# Altium PCB dev_board_layout.PcbDoc (part 1 of 3)
Units mm, origin at the board's own origin, x right, y up, seen from the top; angles counter-clockwise.
Board outline 75.44 x 30.86 mm, 2 copper layers (Top Layer, Bottom Layer); 166 components, 99 nets, 533 pads, 297 vias.
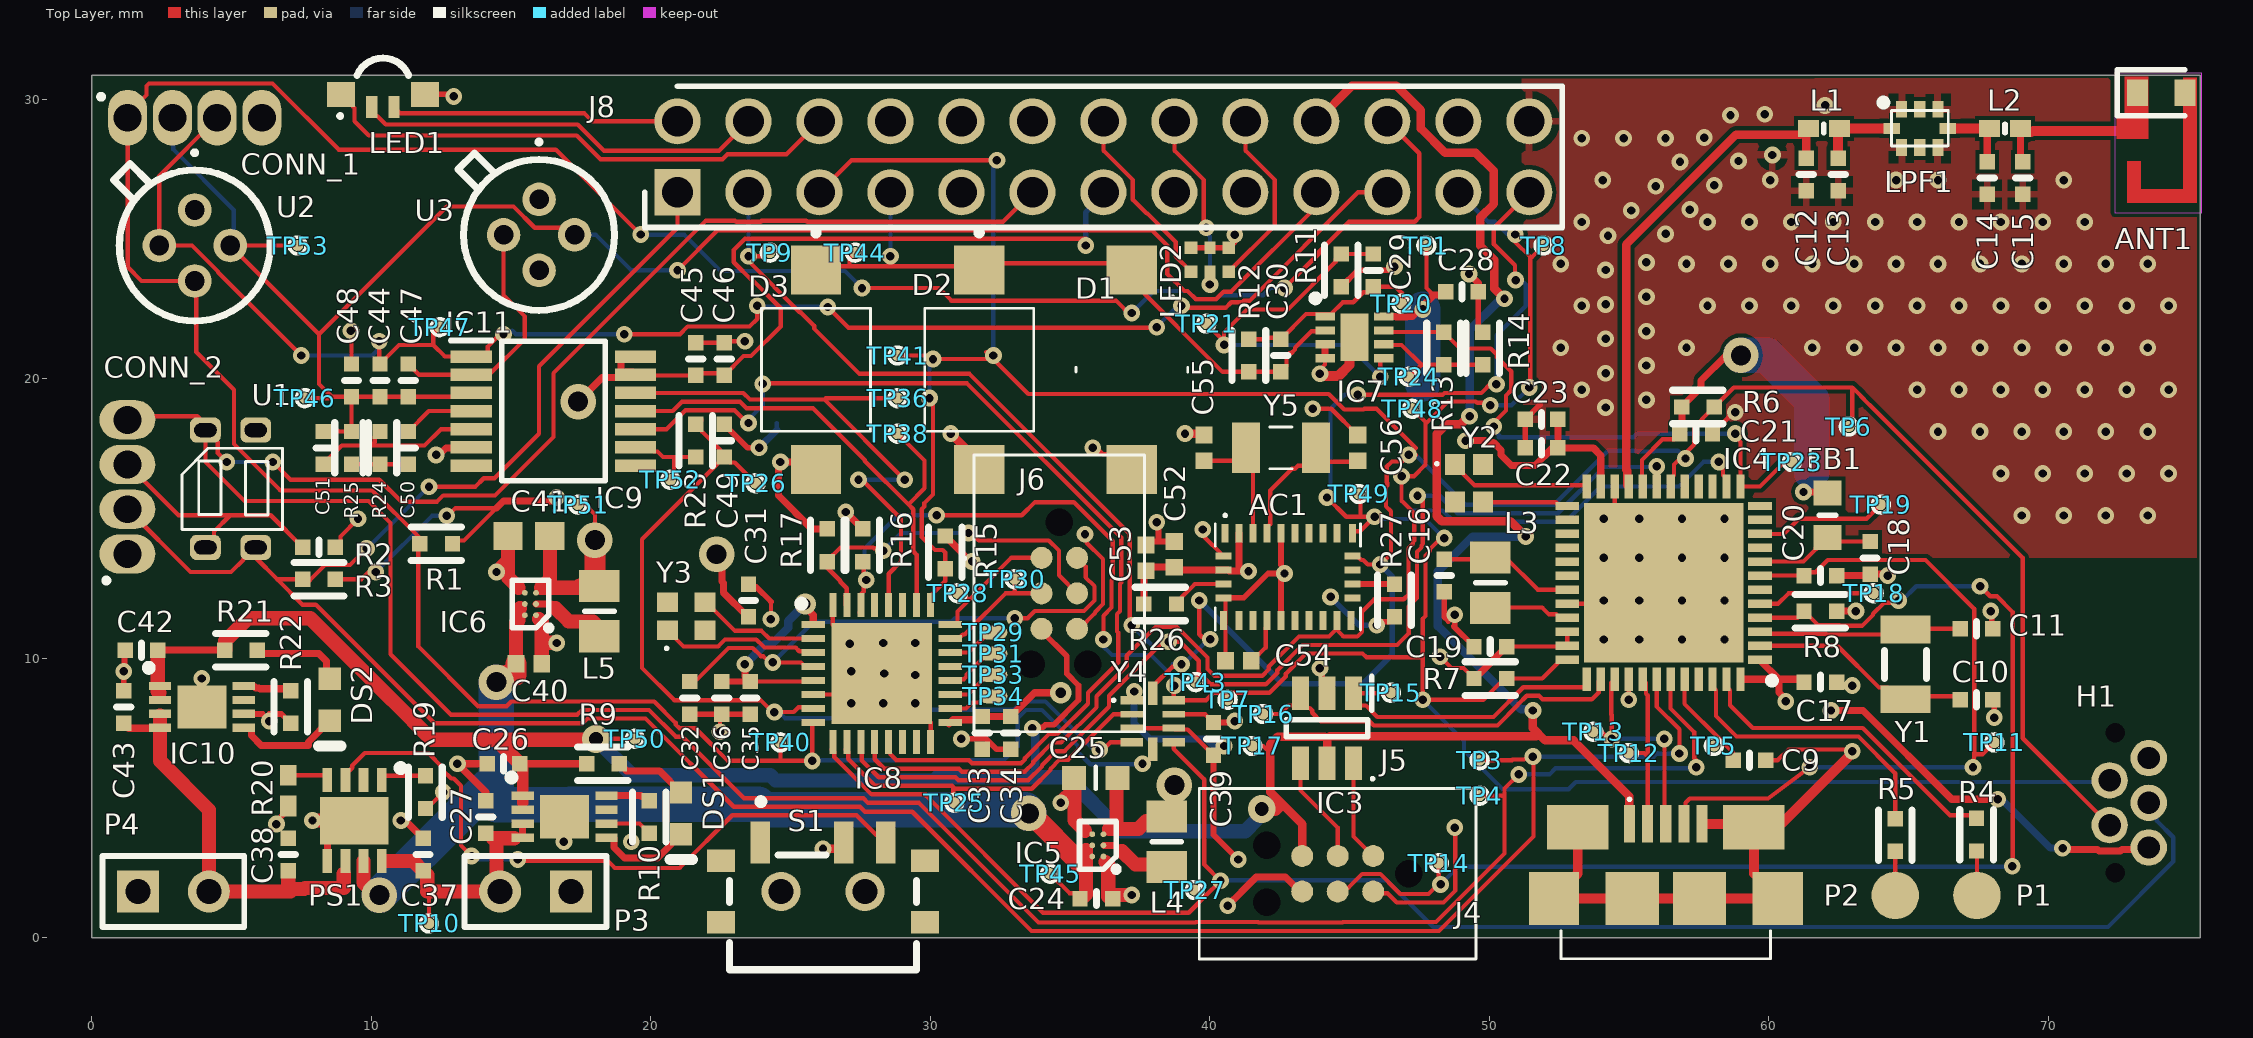
[diagram p0: Top Layer view]
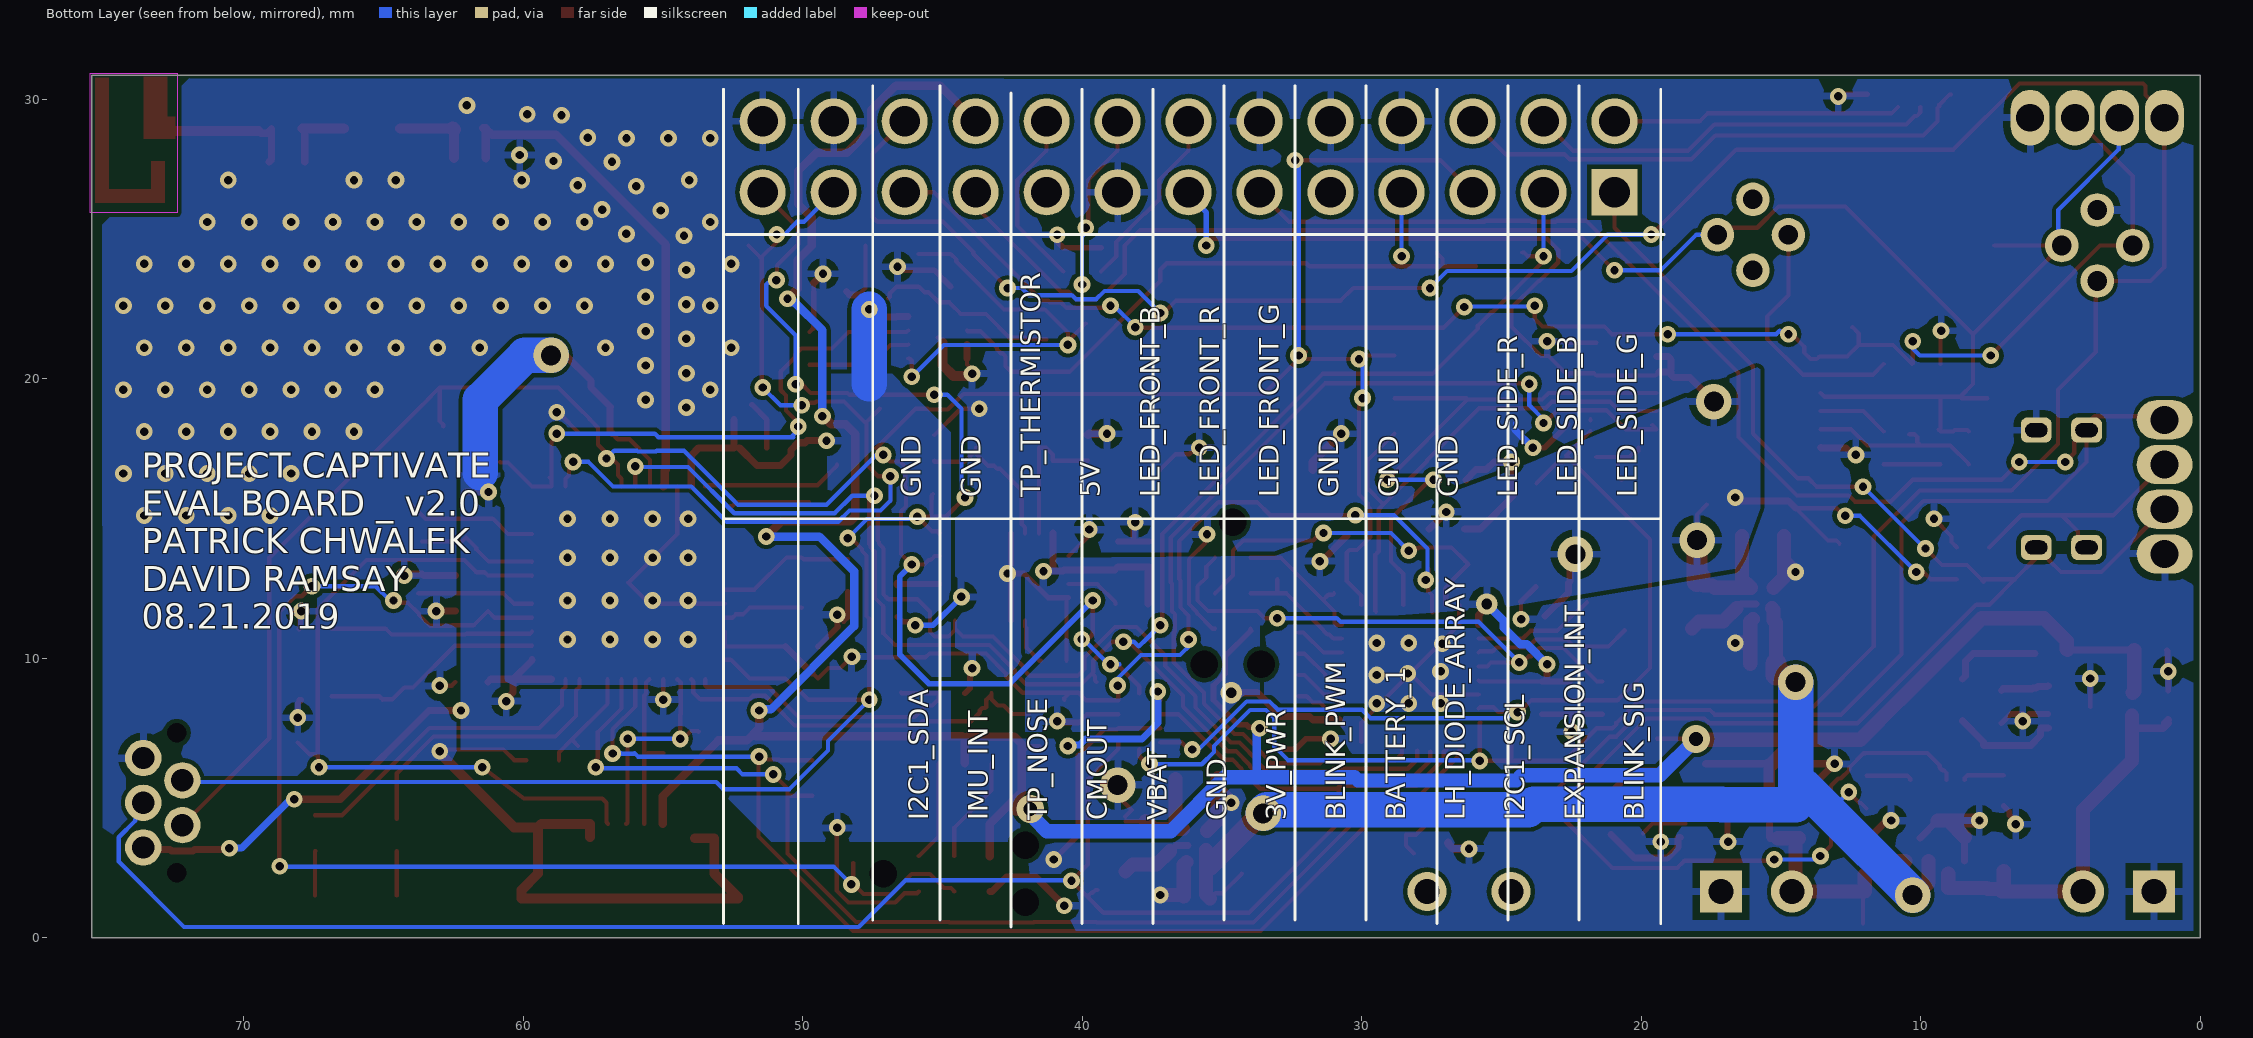
[diagram p1: Bottom Layer view, seen from below]
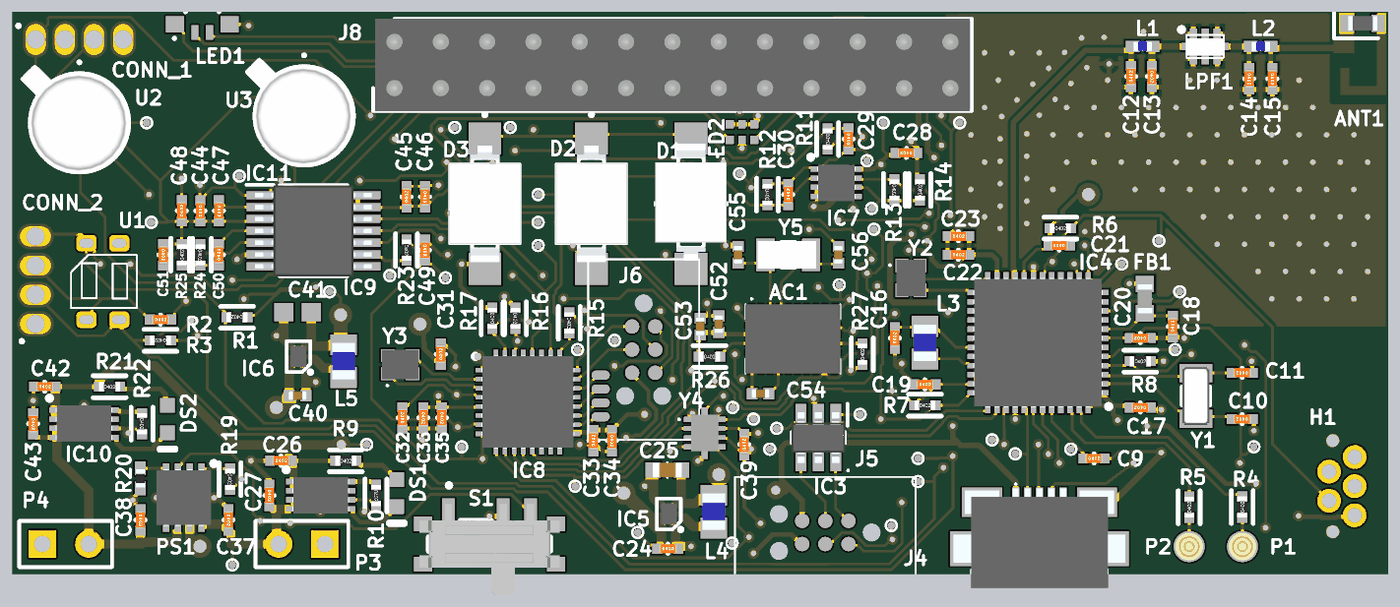
[diagram p3: 3D render of the assembled board from above, using the file's embedded part models]

## Layer stack, top to bottom
Top Solder: solder mask 0.0102, Solder Resist, Dk 3.5
Top Layer: signal copper 0.0356
Dielectric 1: dielectric 0.32, FR-4, Dk 4.8
Bottom Layer: signal copper 0.0356
Bottom Solder: solder mask 0.0102, Solder Resist, Dk 3.5

## Board outline
0,0 75.438,0 75.438,30.861 0,30.861

## Design rules (kind name [scope] priority, off if disabled: settings)
Clearance [All] p1: gap=0.152 ignorepadtopadclearanceinfootprint=FALSE except(0: Arc-Hole Track-Hole SMDPad-Hole THPad-Hole Via-Hole Fill-Hole Poly-Hole Region-Hole Text-Hole)
PolygonConnect [All] p1: connectstyle=Relief reliefconductorwidth=0.254 reliefentries=4 polygonreliefangle="90 Angle" airgapwidth=0.254
RoutingVias RoutingVias_1 [InNet('VBAT_MUX')or InNet('3.3V_MCU')or InNet('3.3V_PWR')] p1: holewidth=0.711 width=1.27 viastyle="Through Hole" minholewidth=0.711 minwidth=1.27 maxholewidth=1 maxwidth=2
RoutingVias [All] p2: holewidth=0.3 width=0.6 viastyle="Through Hole" minholewidth=0.3 minwidth=0.6 maxholewidth=0.711 maxwidth=1.27
SolderMaskExpansion [All] p1: expansion=0.102
Width [InNet('VBAT_MUX')or InNet('3.3V_MCU')or InNet('3.3V_PWR')] p1: maxlimit=1.27 minlimit=0.152 preferedwidth=0.254 minimp=50.000000 maximp=50.000000 favimp=50.000000
Width Width_1 [All] p2: maxlimit=0.508 minlimit=0.152 preferedwidth=0.203 minimp=50.000000 maximp=50.000000 favimp=50.000000
30 further rules are at their usual default settings.

## Classes and differential pairs
component class sch_pwr_brd_sensors: AC1 C44 C45 C46 C47 C48 C49 C50 C51 C52 C53 C54 C55 C56 D3 IC11 R23 R24 R25 R26 R27 TP52 TP53 U3 Y5
component class Sch_pwr_brd_pwr: H1 P4
component class Sch_pwr_brd_pwr_sys: C37 C38 C39 C40 C41 C42 C43 DS2 IC9 IC10 L5 PS1 R19 R20 R21 R22 S1 TP40 TP41 TP43 TP44 TP45 TP46 TP47 TP48 TP49 TP50 TP51 Y4
component class Sch_pwr_brd_MCU: C31 C32 C33 C34 C35 C36 IC8 J6 R15 R16 R17 TP25 TP26 TP27 TP28 TP29 TP30 TP31 TP33 TP34 TP36 TP38 Y3
component class Sch_mcu_brd_sensors: C28 C29 C30 D2 IC7 R11 R12 R13 R14 TP20 TP21 TP23 TP24
component class Sch_mcu_brd_pwr: C24 C25 C26 C27 DS1 IC5 IC6 L4 P3 R9 R10
component class Sch_mcu_brd_mcu: ANT1 C10 C11 C12 C13 C14 C15 C16 C17 C18 C19 C20 C21 C22 C23 FB1 IC4 L1 L2 L3 LPF1 R6 R7 R8 TP18 TP19 Y1 Y2
component class Sch_mcu_brd_external_connectors: C9 IC3 J4 J5 P1 P2 R4 R5 TP1 TP3 TP4 TP5 TP6 TP7 TP8 TP9 TP10 TP11 TP12 TP13 TP14 TP15 TP16 TP17
component class Sch_front: CONN_1 CONN_2 D1 R1 R2 R3 U1 U2
component class Sch_front_led: C? J8 LED1 LED2 LED3 LED4 LED5 LED6

## Components (designator, comment, footprint, x,y, rotation, side; value= is the part's Value field where it differs from the comment)
AC1 "BNO080" BNO080 42.799,13.081 r90 top
ANT1 "2450AT14A0100T" ANTC1608X40N 74.041,30.226 r0 top
C9 "10000pF" SMD-0402C 59.309,6.35 r270 top
C10 "15pF" SMD-0402C 67.437,8.509 r90 top
C11 "15pF" SMD-0402C 67.437,11.049 r90 top
C12 "0.80pF" SMD-0402C 61.341,27.305 r0 top
C13 "0.30pF" SMD-0402C 62.484,27.305 r180 top
C14 "0.80pF" SMD-0402C 67.818,27.178 r180 top
C15 "0.30pF" SMD-0402C 69.088,27.178 r180 top
C16 "4.7µF" SMD-0402C 48.387,12.954 r0 top
C17 "0.10µF" SMD-0402C 61.849,9.144 r90 top
C18 "0.10µF" SMD-0402C 63.627,13.589 r0 top
C19 "0.10µF" SMD-0402C 50.038,10.414 r270 top
C20 "0.10µF" SMD-0402C 61.849,12.954 r90 top
C21 "0.10µF" SMD-0402C 57.404,18.034 r90 top
C22 "0.10µF" SMD-0402C 51.871,17.526 r270 top
C23 "100pF" SMD-0402C 51.871,18.542 r270 top
C24 "2.2µF" SMD-0402C 35.941,1.397 r270 top
C25 "10µF" SMD-0603C 35.922,5.715 r90 top
C26 "4.7µF" SMD-0402C 14.732,6.223 r270 top
C27 "4.7µF" SMD-0402C 14.097,4.318 r180 top
C28 "0.10µF" SMD-0402C 49.022,23.114 r90 top
C29 "10000pF" SMD-0402C 45.847,23.876 r180 top
C30 "5pF" SMD-0402C 42.545,20.828 r0 top
C31 "0.10µF" SMD-0402C 23.495,12.065 r0 top
C32 "0.10µF" SMD-0402C 21.393,8.579 r0 top
C33 "4.7µF" SMD-0402C 31.865,7.328 r0 top
C34 "0.10µF" SMD-0402C 32.881,7.328 r180 top
C35 "10000pF" SMD-0402C 23.552,8.579 r180 top
C36 "1uF" SMD-0402C 22.536,8.579 r180 top
C37 "0.10µF" SMD-0402C 11.852,2.974 r180 top
C38 "0.10µF" SMD-0402C 7.026,2.974 r180 top
C39 "0.10µF" SMD-0402C 40.132,7.112 r0 top
C40 "2.2uF" CAPC1005X55N 15.64,9.798 r180 top
C41 "GRM188R60J106ME47D" CAPC1608X09N 15.64,14.37 r0 top
C42 "4.7µF" SMD-0402C 1.778,10.287 r270 top
C43 "4.7µF" SMD-0402C 1.143,8.255 r180 top
C44 "10000pF" SMD-0402C 10.309,19.939 r180 top
C45 "10000pF" SMD-0402C 21.612,20.701 r0 top
C46 "10µF" SMD-0402C 22.628,20.701 r180 top
C47 "10000pF" SMD-0402C 11.325,19.939 r180 top
C48 "10000pF" SMD-0402C 9.293,19.939 r0 top
C49 "1µF" SMD-0402C 22.628,17.78 r180 top
C50 "10µF" SMD-0402C 11.325,17.526 r0 top
C51 "6800pF" SMD-0402C 8.277,17.526 r180 top
C52 "0.10µF" CAPC1005X55N 38.735,13.716 r90 top
C53 "0.10µF" CAPC1005X55N 37.719,13.589 r90 top
C54 "0.10µF" CAPC1005X55N 41.021,9.906 r180 top
C55 "15pF" CAPC1005X55N 39.795,17.526 r90 top
C56 "15pF" CAPC1005X55N 45.295,17.526 r90 top
CONN_1 "THERMO" 4_pos_1mm_header 3.683,29.337 r0 top
CONN_2 "BLINK" 4_pos_1mm_header 1.27,16.129 r90 top
D1 "VBPW34FASR" VBPW34FAS 37.211,20.32 r270 top
D2 "VBPW34FASR" VBPW34FASR 31.75,20.32 r270 top
D3 "VBPW34FASR" VBPW34FASR 25.908,20.32 r270 top
DS1 "LTST-C190KFKT" LTST-C190KFKT_V 21.082,4.445 r270 top
DS2 "LTST-C190KFKT" LTST-C190KFKT_V 8.509,8.509 r270 top
FB1 "BLM18KG601SZ1D" BEADC1608X95N 62.103,15.113 r90 top
H1 "HTP-CON-M413" HTP-CON-M413 72.898,4.826 r270 top
IC3 "USBLC6-2SC6" SOT95P280X145-6N 44.196,7.493 r270 top
IC4 "STM32WB55CGU6" QFN50P700X700X65-49N-D 56.24,12.696 r180 top
IC5 "FAN53600AUC33X" BGA6C40P2X3_86X116X62 35.995,3.302 r180 top
IC6 "MCP73831T-2ACI_MC" SON50P300X200X100-9N-D 16.915,4.33 r0 top
IC7 "TLV9062IDSGT" SON50P200X200X80-9N 45.178,21.475 r0 top
IC8 "STM32F301K6U6" QFN50P500X500X60-33N-D 28.263,9.45 r0 top
IC9 "FAN53600AUC33X" BGA6C40P2X3_86X116X62 15.694,11.938 r180 top
IC10 "MCP73831T-2ACI_MC" SON50P300X200X100-9N-D 3.937,8.255 r0 top
IC11 "LMP91051MT_NOPB" SOP65P640X120-14N 16.515,18.841 r0 top
J4 "ZX62-B-5PA(33)" ZX62B5PA33 56.318,2.122 r0 top
J5 "TC2030-CTX-NL" TC2030MCPNL10 44.577,2.487 r180 top
J6 "TC2030-CTX-NL" TC2030MCPNL10 34.417,12.319 r270 top
J8 "1-103542-2" HDRV26W89P254X254_2X13_3261X506X1074P 20.955,26.67 r0 top
L1 "LQG15HS2N7S02D" INDC1005X55N 61.976,28.956 r0 top
L2 "LQG15HS2N7S02D" INDC1005X55N 68.453,28.956 r0 top
L3 "LBR2012T100K" INDC2012X145N 50.038,12.7 r90 top
L4 "LQM21PN1R0MC0D" INDC2012X55N 38.462,3.429 r90 top
L5 "LQM21PN1R0MC0D" INDC2012X55N 18.161,11.684 r90 top
LED1 "APFA3010SEKJ3ZGKQBKC" KPFA-3010RGBC-11 10.414,29.972 r180 top
LED2 "SMLP36RGB2W3R" ROHM-1510-(0604) 40.005,24.257 r0 top
LPF1 "LFL212G45TC1A007" LFL212G45TC1A007 65.405,28.956 r0 top
P1 "P70-5000045R" P70-5000045R 67.449,1.512 r0 top
P2 "P70-5000045R" P70-5000045R 64.528,1.512 r0 top
P3 "Header 2" HDR1X2 17.145,1.651 r180 top
P4 "Header 2" HDR1X2 1.651,1.651 r0 top
PS1 "TPS2115ADRBR" SON65P300X300X100-9N-D 9.398,4.191 r270 top
R1 "100k" SMD-0402-RES 12.319,14.097 r90 top
R2 "100" SMD-0402C 8.128,13.97 r270 top
R3 "50K" SMD-0402-RES 8.128,12.827 r90 top
R4 "1k" SMD-0402-RES 67.437,3.683 r0 top
R5 "1k" SMD-0402-RES 64.528,3.671 r0 top
R6 "10k" SMD-0402-RES 57.468,18.986 r270 top
R7 "10k" SMD-0402-RES 50.038,9.271 r270 top
R8 "100k" SMD-0402-RES 61.849,11.684 r270 top
R9 "80.6k" SMD-0402-RES 18.288,6.223 r270 top
R10 "5.6k" SMD-0402-RES 19.939,4.318 r180 top
R11 "47k" SMD-0402-RES 44.704,23.876 r0 top
R12 "100k" SMD-0402-RES 41.402,20.828 r180 top
R13 "47k" SMD-0402-RES 48.366,21.082 r180 top
R14 "3.3k" SMD-0402-RES 49.763,21.082 r0 top
R15 "10k" SMD-0402-RES 30.537,13.786 r180 top
R16 "10k" SMD-0402-RES 27.585,14.04 r180 top
R17 "10k" SMD-0402-RES 26.315,14.04 r0 top
R19 "1M" SMD-0402-RES 11.938,5.207 r180 top
R20 "ERJ-2RKF7500X" RESC1005X40N 7.026,5.26 r90 top
R21 "80.6k" SMD-0402-RES 5.334,10.287 r270 top
R22 "5.6k" SMD-0402-RES 7.112,8.255 r180 top
R23 "1k" SMD-0402-RES 21.612,17.78 r180 top
R24 "160k" SMD-0402-RES 10.309,17.526 r180 top
R25 "160k" SMD-0402-RES 9.293,17.526 r0 top
R26 "10k" SMD-0402-RES 38.227,11.938 r270 top
R27 "0" SMD-0402-RES 46.609,12.065 r0 top
S1 "PCM12SMTR" PCM12SMTR_1 26.162,1.651 r0 top
TP1 "TestPoint" TestPoint_0.4mm 47.752,24.765 r0 top
TP3 "TestPoint" TestPoint_0.4mm 49.657,6.35 r90 top
TP4 "TestPoint" TestPoint_0.4mm 49.657,5.08 r90 top
TP5 "TestPoint" TestPoint_0.4mm 58.039,6.858 r90 top
TP6 "TestPoint" TestPoint_0.4mm 62.865,18.288 r90 top
TP7 "TestPoint" TestPoint_0.4mm 40.64,8.509 r90 top
TP8 "TestPoint" TestPoint_0.4mm 51.943,24.765 r90 top
TP9 "TestPoint" TestPoint_0.4mm 24.257,24.511 r90 top
TP10 "TestPoint" TestPoint_0.4mm 12.065,0.508 r90 top
TP11 "TestPoint" TestPoint_0.4mm 68.072,6.985 r90 top
TP12 "TestPoint" TestPoint_0.4mm 54.991,6.604 r90 top
TP13 "TestPoint" TestPoint_0.4mm 53.721,7.366 r90 top
TP14 "TestPoint" TestPoint_0.4mm 48.193,2.667 r90 top
TP15 "TestPoint" TestPoint_0.4mm 46.482,8.763 r90 top
TP16 "TestPoint" TestPoint_0.4mm 41.91,8.001 r90 top
TP17 "TestPoint" TestPoint_0.4mm 41.529,6.858 r90 top
TP18 "TestPoint" TestPoint_0.4mm 63.754,12.319 r90 top
TP19 "TestPoint" TestPoint_0.4mm 64.008,15.494 r90 top
TP20 "TestPoint" TestPoint_0.4mm 46.858,22.685 r90 top
TP21 "TestPoint" TestPoint_0.4mm 39.878,21.971 r90 top
TP23 "TestPoint" TestPoint_0.4mm 60.833,17.018 r90 top
TP24 "TestPoint" TestPoint_0.4mm 47.117,20.066 r90 top
TP25 "TestPoint" TestPoint_0.4mm 30.861,4.826 r90 top
TP26 "TestPoint" TestPoint_0.4mm 23.749,16.256 r90 top
TP27 "TestPoint" TestPoint_0.4mm 39.462,1.704 r90 top
TP28 "TestPoint" TestPoint_0.4mm 30.988,12.319 r90 top
TP29 "TestPoint" TESTPOINT_1MM_OVAL 32.258,10.922 r90 top
TP30 "TestPoint" TestPoint_0.4mm 33.02,12.827 r90 top
TP31 "TestPoint" TESTPOINT_1MM_OVAL 32.258,10.16 r90 top
TP33 "TestPoint" TESTPOINT_1MM_OVAL 32.258,9.398 r90 top
TP34 "TestPoint" TESTPOINT_1MM_OVAL 32.258,8.636 r90 top
TP36 "TestPoint" TestPoint_0.4mm 28.829,19.304 r90 top
TP38 "TestPoint" TestPoint_0.4mm 28.829,18.034 r90 top
TP40 "TestPoint" TestPoint_0.4mm 24.638,6.985 r90 top
TP41 "TestPoint" TestPoint_0.4mm 28.829,20.828 r90 top
TP43 "TestPoint" TestPoint_0.4mm 39.497,9.144 r90 top
TP44 "TestPoint" TestPoint_0.4mm 27.305,24.511 r90 top
TP45 "TestPoint" TestPoint_0.4mm 34.29,2.286 r90 top
TP46 "TestPoint" TestPoint_0.4mm 7.62,19.304 r90 top
TP47 "TestPoint" TestPoint_0.4mm 12.446,21.844 r90 top
TP48 "TestPoint" TestPoint_0.4mm 47.244,18.923 r90 top
TP49 "TestPoint" TestPoint_0.4mm 45.339,15.875 r90 top
TP50 "TestPoint" TestPoint_0.4mm 19.431,7.112 r90 top
TP51 "TestPoint" TestPoint_0.4mm 17.399,15.494 r90 top
TP52 "TestPoint" TestPoint_0.4mm 20.701,16.383 r90 top
TP53 "TestPoint" TestPoint_0.4mm 7.366,24.765 r90 top
U1 "QRE1113" QRE1113_DIP 5.864,18.161 r180 top
U2 "ZTP-135SR" ZTP-135SR 3.683,24.765 r0 top
U3 "ZTP-135SR" ZTP-135SR 16.002,25.146 r0 top
Y1 "NX3215SA-32.768K-STD-MUA-8" NX3215SA 64.897,9.779 r90 top
Y2 "XRCGB32M000F1H01R0" XRCGB32M000F1H01R0 49.276,16.256 r270 top
Y3 "XRCGB32M000F1H01R0" XRCGB32M000F1H01R0 21.266,11.5 r0 top
Y4 "ADS1015IRUGT" ADS7142IRUGT 37.961,7.743 r270 top
Y5 "FC-135_32.7680KA-A5" FC135327680KAAG0 42.545,17.526 r0 top

## Footprints (in the part's own frame and the unit in brackets; to place one, negate y for a bottom-side part, rotate by r counter-clockwise, add the part's x,y. Pads: shape width x height; smd on the part's side, far side on the other; paste and mask are expansions set on the pad)
4_pos_1mm_header [mm]
  oval 1.4x2 hole 1 mask-0.15: 1(-2.4,0) 2(-0.8,0) 3(0.8,0) 4(2.4,0)
  silkscreen extent -3.4,0.7 -3.3,0.8
ADS7142IRUGT [mm]
  rect 0.3x0.8 smd: 1(-0.75,-0.75) 4(0.75,-0.75) 6(0.75,0.75) 9(-0.75,0.75)
  rect 0.25x0.8 smd: 2(-0.25,-0.75) 3(0.25,-0.75) 7(0.25,0.75) 8(-0.25,0.75)
  rect 0.85x0.35 smd: 5(1,0) 10(-1,0)
  silkscreen extent -0.8,-1.45 -0.7,-1.35, body extent -1,-0.75 1,0.75, height 0.4
ANTC1608X40N [mm]
  rect 0.75x0.95 smd: 1(-0.85,0) 2(0.85,0)
  silkscreen extent -1.58,-0.82 0.85,0.82, body extent -0.8,-0.4 0.8,0.4, height 0.4
BEADC1608X95N [mm]
  rect 0.9x1 smd: 1(-0.8,0) 2(0.8,0)
  silkscreen extent 0,-0.3 0,0.3, body extent -0.8,-0.4 0.8,0.4, height 0.95
BGA6C40P2X3_86X116X62 [mm]
  round 0.208 smd: A1(-0.2,0.4) A2(0.2,0.4) B1(-0.2,0) B2(0.2,0) C1(-0.2,-0.4) C2(0.2,-0.4)
  silkscreen extent -0.75,-0.85 0.65,0.95, body extent -0.43,-0.58 0.43,0.58, height 0.63
BNO080 [mm]
  rect 0.675x0.25 smd: 1(1.387,2.25) 6(-1.738,2.313) 7(-1.738,1.75) 8(-1.738,1.25) 9(-1.738,0.75) 10(-1.738,0.25) 11(-1.738,-0.25) 12(-1.738,-0.75) 13(-1.738,-1.25) 14(-1.738,-1.75) 15(-1.738,-2.263) 20(1.387,-2.313) 21(1.387,-1.75) 22(1.387,-1.25) 23(1.387,-0.75) 24(1.387,-0.25) 25(1.387,0.25) 26(1.387,0.75) 27(1.387,1.25) 28(1.387,1.75)
  rect 0.25x0.575 smd: 2(0.575,2.313) 3(0.075,2.313) 4(-0.425,2.313) 5(-0.925,2.313) 16(-0.925,-2.313) 17(-0.425,-2.313) 18(0.075,-2.313) 19(0.575,-2.313)
  silkscreen extent -2.07,-2.6 2.07,2.6, body extent -2.07,-2.6 1.73,2.6, height 1.28
CAPC1005X55N [mm]
  rect 0.6x0.62 smd: 1(-0.46,0) 2(0.46,0)
  body extent -0.5,-0.25 0.5,0.25, height 0.55
CAPC1608X09N [mm] "Chip Capacitor, 2-Leads, Body 1.60x0.81mm, IPC Medium Density"
  rect 1.05x1 smd: 1(-0.75,0) 2(0.75,0)
  body extent -0.88,-0.48 0.87,0.48, height 0.94
FC135327680KAAG0 [mm]
  rect 1x1.8 smd: 1(-1.25,0) 2(1.25,0)
  silkscreen extent -0.4,-0.75 0.4,0.75, body extent -1.68,-0.76 1.52,0.74, height 0.9
HDR1X2 [mm] "Connector; Header; 2 Position"
  rect 1.5x1.5 hole 0.9: 1(0,0)
  round 1.5 hole 0.9: 2(2.54,0)
  silkscreen extent -1.27,-1.27 3.81,1.27
HDRV26W89P254X254_2X13_3261X506X1074P [mm]
  rect 1.65x1.65 hole 1.1: 1(0,0)
  round 1.65 hole 1.1: 2(0,2.537) 3(2.54,0) 4(2.54,2.537) 5(5.08,0) 6(5.08,2.537) 7(7.62,0) 8(7.62,2.537) 9(10.16,0) 10(10.16,2.537) 11(12.7,0) 12(12.7,2.537) 13(15.24,0) 14(15.24,2.537) 15(17.78,0) 16(17.78,2.537) 17(20.32,0) 18(20.32,2.537) 19(22.86,0) 20(22.86,2.537) 21(25.4,0) 22(25.4,2.537) 23(27.94,0) 24(27.94,2.537) 25(30.48,0) 26(30.48,2.537)
  silkscreen extent -1.17,-1.26 31.65,3.8, body extent -1.07,-1.26 31.55,3.8, height 10.74
HTP-CON-M413 [mm]
  round 1.3 hole 0.8: 1(1.6,0.7) 2(0.8,-0.7) 3(0,0.7) 4(-0.8,-0.7) 5(-1.6,0.7)
  round 0 hole 0.7: ""(-2.5,-0.5) ""(2.5,-0.5)
INDC1005X55N [mm]
  rect 0.75x0.6 smd: 1(-0.55,0) 2(0.55,0)
  silkscreen extent 0,-0.15 0,0.15, body extent -0.5,-0.25 0.5,0.25, height 0.55
INDC2012X55N [mm]
  rect 1.15x1.45 smd: 1(-0.9,0) 2(0.9,0)
  silkscreen extent 0,-0.53 0,0.53, body extent -1,-0.63 1,0.63, height 0.55
INDC2012X145N [mm]
  rect 1.15x1.45 smd: 1(-0.9,0) 2(0.9,0)
  silkscreen extent 0,-0.53 0,0.53, body extent -1,-0.63 1,0.63, height 1.45
KPFA-3010RGBC-11 [mm]
  rect 1x0.9 smd: 1(1.5,-0.2) 2(-1.5,-0.2)
  rect 0.4x0.8 smd: 3(-0.4,0.25) 4(0.4,0.25)
  silkscreen extent -0.92,-1.5 1.54,0.59
LFL212G45TC1A007 [mm]
  rect 0.4x0.6 smd: 1(-0.65,0.685) 2(0,0.685) 3(0.65,0.685) 5(0.65,-0.685) 6(0,-0.685) 7(-0.65,-0.685)
  rect 0.6x0.4 smd: 4(1,0) 8(-1,0)
  silkscreen extent -1.42,-0.64 1.02,1.05, body extent -1,-0.5 1,0.45, height 0.87
LTST-C190KFKT_V [mm] "SMD, 2-Leads, Body 1.6x0.8mm"
  rect 0.8x0.8 smd: 1(-0.75,0) 2(0.75,0)
  silkscreen extent 1.65,-0.4 1.65,0.4, body extent -0.8,-0.4 0.8,0.4, height 0.9
NX3215SA [mm]
  rect 1x1.8 smd: 1(-1.25,0) 2(1.25,0)
  silkscreen extent -0.5,-0.75 0.5,0.75, body extent -1.6,-0.75 1.6,0.75, height 0.8
P70-5000045R [mm]
  round 1.7 smd: 1(0,0)
  body extent -0.75,-0.75 0.75,0.75, height 2.4
PCM12SMTR_1 [mm]
  rect 0.7x1.5 smd: 1(-2.25,1.75) 2(0.75,1.75) 3(2.25,1.75)
  rect 1x0.8 smd: 4(-3.65,1.1) 5(-3.65,-1.1) 6(3.65,1.1) 7(3.65,-1.1)
  round 1.4 hole 0.9: 8(-1.5,0) 9(1.5,0)
  silkscreen extent -3.35,-2.8 3.35,3.32, body extent -3.85,-2.8 3.85,2.2, height 1.4
QFN50P500X500X60-33N-D [mm]
  rect 0.85x0.25 smd: 1(-2.45,1.75) 2(-2.45,1.25) 3(-2.45,0.75) 4(-2.45,0.25) 5(-2.45,-0.25) 6(-2.45,-0.75) 7(-2.45,-1.25) 8(-2.45,-1.75) 17(2.45,-1.75) 18(2.45,-1.25) 19(2.45,-0.75) 20(2.45,-0.25) 21(2.45,0.25) 22(2.45,0.75) 23(2.45,1.25) 24(2.45,1.75)
  rect 0.25x0.85 smd: 9(-1.75,-2.45) 10(-1.25,-2.45) 11(-0.75,-2.45) 12(-0.25,-2.45) 13(0.25,-2.45) 14(0.75,-2.45) 15(1.25,-2.45) 16(1.75,-2.45) 25(1.75,2.45) 26(1.25,2.45) 27(0.75,2.45) 28(0.25,2.45) 29(-0.25,2.45) 30(-0.75,2.45) 31(-1.25,2.45) 32(-1.75,2.45)
  rect 3.6x3.6 smd: 33(0,0)
  silkscreen extent -3,2.38 -2.75,2.62, body extent -2.55,-2.55 2.55,2.55, height 0.6
QFN50P700X700X65-49N-D [mm]
  rect 0.85x0.3 smd: 1(-3.45,2.75) 2(-3.45,2.25) 3(-3.45,1.75) 4(-3.45,1.25) 5(-3.45,0.75) 6(-3.45,0.25) 7(-3.45,-0.25) 8(-3.45,-0.75) 9(-3.45,-1.25) 10(-3.45,-1.75) 11(-3.45,-2.25) 12(-3.45,-2.75) 25(3.45,-2.75) 26(3.45,-2.25) 27(3.45,-1.75) 28(3.45,-1.25) 29(3.45,-0.75) 30(3.45,-0.25) 31(3.45,0.25) 32(3.45,0.75) 33(3.45,1.25) 34(3.45,1.75) 35(3.45,2.25) 36(3.45,2.75)
  rect 0.3x0.85 smd: 13(-2.75,-3.45) 14(-2.25,-3.45) 15(-1.75,-3.45) 16(-1.25,-3.45) 17(-0.75,-3.45) 18(-0.25,-3.45) 19(0.25,-3.45) 20(0.75,-3.45) 21(1.25,-3.45) 22(1.75,-3.45) 23(2.25,-3.45) 24(2.75,-3.45) 37(2.75,3.45) 38(2.25,3.45) 39(1.75,3.45) 40(1.25,3.45) 41(0.75,3.45) 42(0.25,3.45) 43(-0.25,3.45) 44(-0.75,3.45) 45(-1.25,3.45) 46(-1.75,3.45) 47(-2.25,3.45) 48(-2.75,3.45)
  rect 5.7x5.7 smd: 49(0,0)
  silkscreen extent -4,3.38 -3.75,3.62, body extent -3.55,-3.55 3.55,3.55, height 0.65
QRE1113_DIP [mm] "QRE1113 IR PHOTODIODE/TRANSISTOR PAIR"
  rrect50% 1.1x0.9 hole 0.5 slot 0.8 at 0 deg: 1(1.8,0) 2(1.8,4.2) 3(0,4.2) 4(0,0)
  silkscreen extent -0.96,0.65 2.64,3.55
RESC1005X40N [mm]
  rect 0.75x0.6 smd: 1(-0.55,0) 2(0.55,0)
  body extent -0.5,-0.25 0.5,0.25, height 0.4
ROHM-1510-(0604) [mm]
  rect 0.45x0.45 smd: 1(-0.675,-0.425) 3(0.675,-0.425) 4(0.675,0.425) 6(-0.675,0.425)
  rect 0.4x0.45 smd: 2(0,-0.425) 5(0,0.425)
SMD-0402-RES [mm]
  rect 0.55x0.55 smd: 1(0,0.584) 2(0,-0.584)
  silkscreen extent -0.6,-0.9 0.6,0.9, body extent -0.28,-0.57 0.27,0.58, height 0.41
SMD-0402C [mm]
  rect 0.55x0.55 smd: 1(0,0.584) 2(0,-0.584)
  silkscreen extent -0.25,0 0.25,0, body extent -0.25,-0.51 0.25,0.51, height 0.51
SMD-0603C [mm]
  rect 0.85x0.85 smd: 1(0,0.775) 2(0,-0.775)
  silkscreen extent -0.4,0 0.4,0, body extent -0.4,-0.8 0.4,0.8, height 0.9
SON50P200X200X80-9N [mm]
  rect 0.7x0.3 smd: 1(-1.05,0.75) 2(-1.05,0.25) 3(-1.05,-0.25) 4(-1.05,-0.75) 5(1.05,-0.75) 6(1.05,-0.25) 7(1.05,0.25) 8(1.05,0.75)
  rect 1x1.7 smd: 9(0,0)
  silkscreen extent -1.52,1.28 -1.27,1.52, body extent -1.05,-1 1.05,1, height 0.8
SON50P300X200X100-9N-D [mm]
  rect 0.8x0.3 smd: 1(-1.5,0.75) 2(-1.5,0.25) 3(-1.5,-0.25) 4(-1.5,-0.75) 5(1.5,-0.75) 6(1.5,-0.25) 7(1.5,0.25) 8(1.5,0.75)
  rect 1.75x1.55 smd: 9(0,0)
  silkscreen extent -2.02,1.28 -1.77,1.52, body extent -1.55,-1 1.55,1, height 1
SON65P300X300X100-9N-D [mm]
  rect 0.85x0.35 smd: 1(-1.45,0.975) 2(-1.45,0.325) 3(-1.45,-0.325) 4(-1.45,-0.975) 5(1.45,-0.975) 6(1.45,-0.325) 7(1.45,0.325) 8(1.45,0.975)
  rect 1.7x2.45 smd: 9(0,0)
  silkscreen extent -2,1.53 -1.75,1.78, body extent -1.55,-1.5 1.55,1.5, height 1
SOP65P640X120-14N [mm]
  rect 1.475x0.45 smd: 1(-2.938,1.95) 2(-2.938,1.3) 3(-2.938,0.65) 4(-2.938,0) 5(-2.938,-0.65) 6(-2.938,-1.3) 7(-2.938,-1.95) 8(2.938,-1.95) 9(2.938,-1.3) 10(2.938,-0.65) 11(2.938,0) 12(2.938,0.65) 13(2.938,1.3) 14(2.938,1.95)
  silkscreen extent -3.67,-2.5 1.85,2.52, body extent -3.2,-2.5 3.2,2.5, height 1.2
SOT95P280X145-6N [mm]
  rect 1.2x0.6 smd: 1(-1.25,0.95) 2(-1.25,0) 3(-1.25,-0.95) 4(1.25,-0.95) 5(1.25,0) 6(1.25,0.95)
  silkscreen extent -1.85,-1.46 0.3,1.6, body extent -1.4,-1.46 1.4,1.46, height 1.45
TC2030MCPNL10 [mm]
  round 0.787 smd: 1(-1.27,-0.434) 2(-1.27,0.836) 3(0,-0.434) 4(0,0.836) 5(1.27,-0.434) 6(1.27,0.836)
  round 0.495 hole 0.991 unplated: 7(-2.54,0.201) 8(2.54,1.217) 9(2.54,-0.815)
  silkscreen extent -4.95,-3.25 4.95,3.25
TestPoint_0.4mm [mm]
  round 0.4 smd: 1(0,0)
  silkscreen extent -0.3,-0.3 0.3,0.3
TESTPOINT_1MM_OVAL [mm]
  oval 0.5x1 smd: 1(0,0)
VBPW34FAS [mm] "IR Photodiode SMD (Vive)"
  rect 1.75x1.8 smd: 1(-3.575,0) 2(3.575,0)
  silkscreen extent -2.65,-2 0.08,2, body extent -3.29,-1.95 3.11,1.95, height 1.48
VBPW34FASR [mm]
  rect 1.75x1.8 smd: 1(-3.575,0) 2(3.575,0)
  silkscreen extent -5,-1.95 2.2,1.95, body extent -3.2,-1.95 3.2,1.95, height 1.51
XRCGB32M000F1H01R0 [mm]
  rect 0.75x0.7 smd: 1(-0.675,-0.5) 2(0.675,-0.5) 3(0.675,0.5) 4(-0.675,0.5)
  silkscreen extent -0.75,-1.2 -0.65,-1.1, body extent -1,-0.8 1,0.8, height 0.8
ZTP-135SR [mm]
  round 1.2 hole 0.7: 1(0,1.27) 2(1.27,0) 3(0,-1.27) 4(-1.27,0)
  silkscreen extent -2.9,-2.7 2.7,3.35, body extent -3.24,-2.79 2.74,3.19, height 2.67
ZX62B5PA33 [mm]
  rect 0.4x1.35 smd: 1(-1.3,1.95) 2(-0.65,1.95) 3(0,1.95) 4(0.65,1.95) 5(1.3,1.95)
  rect 2.2x1.6 smd: 6(-3.15,1.825) 7(3.15,1.825)
  rect 1.8x1.9 smd: 8(-4,-0.725) 11(4,-0.725)
  rect 1.9x1.9 smd: 9(-1.2,-0.725) 10(1.2,-0.725)
  silkscreen extent -3.75,-2.88 3.75,2.87, body extent -4.72,-2.88 4.72,2.59, height 2.9

## Part data
AC1: "Accelerometer", Manufacturer_Name="Hillcrest Laboratories", Datasheet Link=http://www.hillcrestlabs.com/download/5a05f340566d07c196001ec1, Height=1.18mm, Manufacturer_Part_Number=BNO080
ANT1: "Antenna", Manufacturer_Name="JOHANSON TECHNOLOGY", Mouser Part Number=609-2450AT14A0100T, Datasheet Link=https://www.johansontechnology.com/datasheets/2450AT14A0100/2450AT14A0100.pdf, Height=0.4mm, Manufacturer_Part_Number=2450AT14A0100T, Mouser Price/Stock=https://www.mouser.com/Search/Refine.aspx?Keyword=609-2450AT14A0100T
C9 C29 C35 C44 C45 C47 C48: library part GCM155R71H103KA55D, "CAP CER 10000PF 50V X7R 0402", Digi-Key Part Number=490-4762-1-ND, Manufacturer="Murata Electronics North America", Operating Temperature="-55°C ~ 125°C", Package / Case="0402 (1005 Metric)", Ratings=AEC-Q200, Temperature Coefficient=X7R, Tolerance=±10%, Voltage=50V, @ qty=0, Applications=Automotive, Datasheets=http://www.murata.com/~/media/webrenewal/support/library/catalog/products/capacitor/mlcc/c03e.ashx, Factory Stock=0, Features=-, Height - Seated (Max)=-, Image=//media.digikey.com/Renders/Murata%20Renders/ZRB-SERIES-0402.jpg, Lead Spacing=-, Lead Style=-, Minimum Quantity=1, Mounting Type="Surface Mount, MLCC", Packaging="Cut Tape (CT)", Part Number=GCM155R71H103KA55D, Part Status=Active, Quantity Available=650067, Series=GCM, Size / Dimension="0.039\" L x 0.020\" W (1.00mm x 0.50mm)", Thickness (Max)="0.022\" (0.55mm)", Unit Price (USD)=0.1
C10 C11 C55 C56: library part GCM1555C1H150JA16D, "CAP CER 15PF 50V NP0 0402", Digi-Key Part Number=490-11147-1-ND, Manufacturer="Murata Electronics North America", Operating Temperature="-55°C ~ 125°C", Package / Case="0402 (1005 Metric)", Ratings=AEC-Q200, Temperature Coefficient="C0G, NP0", Tolerance=±5%, Voltage=50V, @ qty=0, Applications=Automotive, Datasheets=http://www.murata.com/~/media/webrenewal/support/library/catalog/products/capacitor/mlcc/c03e.ashx, Factory Stock=0, Features=-, Height - Seated (Max)=-, Image=//media.digikey.com/Renders/Murata%20Renders/ZRB-SERIES-0402.jpg, Lead Spacing=-, Lead Style=-, Minimum Quantity=1, Mounting Type="Surface Mount, MLCC", Packaging="Cut Tape (CT)", Part Number=GCM1555C1H150JA16D, Part Status=Active, Quantity Available=6185, Series=GCM, Size / Dimension="0.039\" L x 0.020\" W (1.00mm x 0.50mm)", Thickness (Max)="0.022\" (0.55mm)", Unit Price (USD)=0.1
C12 C14: library part GRM1555C1HR80BA01D, "CAP CER 0.8PF 50V NP0 0402", Digi-Key Part Number=490-6269-1-ND, Manufacturer="Murata Electronics North America", Operating Temperature="-55°C ~ 125°C", Package / Case="0402 (1005 Metric)", Ratings=-, Temperature Coefficient="C0G, NP0", Tolerance=±0.1pF, Voltage=50V, @ qty=0, Applications="General Purpose", Datasheets=http://www.murata.com/~/media/webrenewal/support/library/catalog/products/capacitor/mlcc/c02e.pdf, Factory Stock=0, Features=-, Height - Seated (Max)=-, Image=//media.digikey.com/Renders/Murata%20Renders/ZRB-SERIES-0402.jpg, Lead Spacing=-, Lead Style=-, Minimum Quantity=1, Mounting Type="Surface Mount, MLCC", Packaging="Cut Tape (CT)", Part Number=GRM1555C1HR80BA01D, Part Status=Active, Quantity Available=38847, Series=GRM, Size / Dimension="0.039\" L x 0.020\" W (1.00mm x 0.50mm)", Thickness (Max)="0.022\" (0.55mm)", Unit Price (USD)=0.1
C13 C15: library part GRM1555C1HR30WA01D, "CAP CER 0.3PF 50V NP0 0402", Digi-Key Part Number=490-6261-1-ND, Manufacturer="Murata Electronics North America", Operating Temperature="-55°C ~ 125°C", Package / Case="0402 (1005 Metric)", Ratings=-, Temperature Coefficient="C0G, NP0", Tolerance=±0.05pF, Voltage=50V, @ qty=0, Applications="General Purpose", Datasheets=http://www.murata.com/~/media/webrenewal/support/library/catalog/products/capacitor/mlcc/c02e.pdf, Factory Stock=0, Features=-, Height - Seated (Max)=-, Image=//media.digikey.com/Renders/Murata%20Renders/ZRB-SERIES-0402.jpg, Lead Spacing=-, Lead Style=-, Minimum Quantity=1, Mounting Type="Surface Mount, MLCC", Packaging="Cut Tape (CT)", Part Number=GRM1555C1HR30WA01D, Part Status=Active, Quantity Available=61475, Series=GRM, Size / Dimension="0.039\" L x 0.020\" W (1.00mm x 0.50mm)", Thickness (Max)="0.022\" (0.55mm)", Unit Price (USD)=0.16
C16 C26 C27 C33 C42 C43: library part GRM153R60G475ME15D, "CAP CER 4.7UF 4V X5R 0402", Digi-Key Part Number=490-13231-1-ND, Manufacturer="Murata Electronics North America", Operating Temperature="-55°C ~ 85°C", Package / Case="0402 (1005 Metric)", Ratings=-, Temperature Coefficient=X5R, Tolerance=±20%, Voltage=4V, @ qty=0, Applications="General Purpose", Datasheets=http://psearch.en.murata.com/capacitor/product/GRM153R60G475ME15%23.pdf, Factory Stock=0, Features=-, Height - Seated (Max)=-, Image=//media.digikey.com/Renders/Murata%20Renders/ZRB-SERIES-0402.jpg, Lead Spacing=-, Lead Style=-, Minimum Quantity=1, Mounting Type="Surface Mount, MLCC", Packaging="Cut Tape (CT)", Part Number=GRM153R60G475ME15D, Part Status=Active, Quantity Available=9100, Series=GRM, Size / Dimension="0.039\" L x 0.020\" W (1.00mm x 0.50mm)", Thickness (Max)="0.013\" (0.33mm)", Unit Price (USD)=0.27
C17 C18 C19 C20 C21 C22 C28 C31 C32 C34 C37 C38 C39 C52 C53 C54: library part GCM155R71C104KA55D, "CAP CER 0.1UF 16V X7R 0402", Digi-Key Part Number=490-4759-1-ND, Manufacturer="Murata Electronics North America", Operating Temperature="-55°C ~ 125°C", Package / Case="0402 (1005 Metric)", Ratings=AEC-Q200, Temperature Coefficient=X7R, Tolerance=±10%, Voltage=16V, @ qty=0, Applications=Automotive, Datasheets=http://www.murata.com/~/media/webrenewal/support/library/catalog/products/capacitor/mlcc/c03e.ashx, Factory Stock=0, Features=-, Height - Seated (Max)=-, Image=//media.digikey.com/Renders/Murata%20Renders/ZRB-SERIES-0402.jpg, Lead Spacing=-, Lead Style=-, Minimum Quantity=1, Mounting Type="Surface Mount, MLCC", Packaging="Cut Tape (CT)", Part Number=GCM155R71C104KA55D, Part Status=Active, Quantity Available=734194, Series=GCM, Size / Dimension="0.039\" L x 0.020\" W (1.00mm x 0.50mm)", Thickness (Max)="0.022\" (0.55mm)", Unit Price (USD)=0.1
C23: library part GCM1555C1H101JA16D, "CAP CER 100PF 50V NP0 0402", Digi-Key Part Number=490-10669-1-ND, Manufacturer="Murata Electronics North America", Operating Temperature="-55°C ~ 125°C", Package / Case="0402 (1005 Metric)", Ratings=AEC-Q200, Temperature Coefficient="C0G, NP0", Tolerance=±5%, Voltage=50V, @ qty=0, Applications=Automotive, Datasheets=http://www.murata.com/~/media/webrenewal/support/library/catalog/products/capacitor/mlcc/c03e.ashx, Factory Stock=0, Features=-, Height - Seated (Max)=-, Image=//media.digikey.com/Renders/Murata%20Renders/ZRB-SERIES-0402.jpg, Lead Spacing=-, Lead Style=-, Minimum Quantity=1, Mounting Type="Surface Mount, MLCC", Packaging="Cut Tape (CT)", Part Number=GCM1555C1H101JA16D, Part Status=Active, Quantity Available=61397, Series=GCM, Size / Dimension="0.039\" L x 0.020\" W (1.00mm x 0.50mm)", Thickness (Max)="0.022\" (0.55mm)", Unit Price (USD)=0.1
C24: library part GRM155R60J225ME15D, "CAP CER 2.2UF 6.3V X5R 0402", Digi-Key Part Number=490-4519-1-ND, Manufacturer="Murata Electronics North America", Operating Temperature="-55°C ~ 85°C", Package / Case="0402 (1005 Metric)", Ratings=-, Temperature Coefficient=X5R, Tolerance=±20%, Voltage=6.3V, @ qty=0, Applications="General Purpose", Datasheets=http://www.murata.com/~/media/webrenewal/support/library/catalog/products/capacitor/mlcc/c02e.pdf, Factory Stock=0, Features="Derating Recommended", Height - Seated (Max)=-, Image=//media.digikey.com/Renders/Murata%20Renders/ZRB-SERIES-0402.jpg, Lead Spacing=-, Lead Style=-, Minimum Quantity=1, Mounting Type="Surface Mount, MLCC", Packaging="Cut Tape (CT)", Part Number=GRM155R60J225ME15D, Part Status=Active, Quantity Available=911621, Series=GRM, Size / Dimension="0.039\" L x 0.020\" W (1.00mm x 0.50mm)", Thickness (Max)="0.022\" (0.55mm)", Unit Price (USD)=0.15
C25: library part GRM188R60J106ME47D, "CAP CER 10UF 6.3V X5R 0603", Digi-Key Part Number=490-3896-1-ND, Manufacturer="Murata Electronics North America", Operating Temperature="-55°C ~ 85°C", Package / Case="0603 (1608 Metric)", Ratings=-, Temperature Coefficient=X5R, Tolerance=±20%, Voltage=6.3V, @ qty=0, Applications="General Purpose", Datasheets=http://www.murata.com/~/media/webrenewal/support/library/catalog/products/capacitor/mlcc/c02e.pdf, Factory Stock=0, Features=-, Height - Seated (Max)=-, Image=//media.digikey.com/Renders/Murata%20Renders/ZRB-SERIES-0402.jpg, Lead Spacing=-, Lead Style=-, Minimum Quantity=1, Mounting Type="Surface Mount, MLCC", Packaging="Cut Tape (CT)", Part Number=GRM188R60J106ME47D, Part Status=Active, Quantity Available=1578882, Series=GRM, Size / Dimension="0.063\" L x 0.031\" W (1.60mm x 0.80mm)", Thickness (Max)="0.035\" (0.90mm)", Unit Price (USD)=0.15
C30: library part GJM1555C1H5R0BB01D, "CAP CER 5PF 50V NP0 0402", Digi-Key Part Number=490-8103-1-ND, Manufacturer="Murata Electronics North America", Operating Temperature="-55°C ~ 125°C", Package / Case="0402 (1005 Metric)", Ratings=-, Temperature Coefficient="C0G, NP0", Tolerance=±0.1pF, Voltage=50V, @ qty=0, Applications="RF, Microwave, High Frequency", Datasheets=http://www.murata.com/~/media/webrenewal/support/library/catalog/products/capacitor/mlcc/c02e.pdf, Factory Stock=0, Features="High Q, Low Loss", Height - Seated (Max)=-, Image=//media.digikey.com/Renders/Murata%20Renders/ZRB-SERIES-0402.jpg, Lead Spacing=-, Lead Style=-, Minimum Quantity=1, Mounting Type="Surface Mount, MLCC", Packaging="Cut Tape (CT)", Part Number=GJM1555C1H5R0BB01D, Part Status=Active, Quantity Available=17055, Series=GJM, Size / Dimension="0.039\" L x 0.020\" W (1.00mm x 0.50mm)", Thickness (Max)="0.022\" (0.55mm)", Unit Price (USD)=0.2
C36: library part GCM155R71H103KA55D, "CAP CER 1UF 0402", Digi-Key Part Number=490-4762-1-ND, Manufacturer="Murata Electronics North America", Operating Temperature="-55°C ~ 125°C", Package / Case="0402 (1005 Metric)", Part Number=JMK105BJ105KP-F, Ratings=AEC-Q200, Temperature Coefficient=X7R, Tolerance=±10%, Voltage=50V, @ qty=0, Applications=Automotive, Datasheets=http://www.murata.com/~/media/webrenewal/support/library/catalog/products/capacitor/mlcc/c03e.ashx, Factory Stock=0, Features=-, Height - Seated (Max)=-, Image=//media.digikey.com/Renders/Murata%20Renders/ZRB-SERIES-0402.jpg, Lead Spacing=-, Lead Style=-, Minimum Quantity=1, Mounting Type="Surface Mount, MLCC", Packaging="Cut Tape (CT)", Part Status=Active, Quantity Available=650067, Series=GCM, Size / Dimension="0.039\" L x 0.020\" W (1.00mm x 0.50mm)", Thickness (Max)="0.022\" (0.55mm)", Unit Price (USD)=0.1
C40: library part GRM155R60J225ME15D, "Capacitor", Manufacturer_Name="Murata Electronics", Mouser Part Number=81-GRM155R60J225ME5D, RS Part Number=8145227, Datasheet Link=http://www.murata.com/~/media/webrenewal/support/library/catalog/products/capacitor/mlcc/c02e.pdf, Height=0.55mm, Manufacturer_Part_Number=GRM155R60J225ME15D, Mouser Price/Stock=https://www.mouser.com/Search/Refine.aspx?Keyword=81-GRM155R60J225ME5D, RS Price/Stock=https://uk.rs-online.com/web/p/products/8145227
C41: "Capacitor", Manufacturer_Name="Murata Electronics", Mouser Part Number=81-GRM188R60J106ME47, RS Part Number=7235543P, Datasheet Link=http://psearch.en.murata.com/capacitor/product/GRM188R60J106ME47%23.pdf, Height=0.9mm, Manufacturer_Part_Number=GRM188R60J106ME47D, Mouser Price/Stock=https://www.mouser.com/Search/Refine.aspx?Keyword=81-GRM188R60J106ME47, RS Price/Stock=http://uk.rs-online.com/web/p/products/7235543P
C46 C50: library part GRJ155R60J106ME11D, "CAP CER 10UF 6.3V X5R 0402", Digi-Key Part Number=490-13211-1-ND, Manufacturer="Murata Electronics North America", Operating Temperature="-55°C ~ 85°C", Package / Case="0402 (1005 Metric)", Ratings=-, Temperature Coefficient=X5R, Tolerance=±20%, Voltage=6.3V, @ qty=0, Applications="Boardflex Sensitive", Datasheets=http://psearch.en.murata.com/capacitor/product/GRJ155R60J106ME11%23.pdf, Factory Stock=0, Features="Derating Recommended, Soft Termination", Height - Seated (Max)=-, Image=//media.digikey.com/Renders/Murata%20Renders/ZRB-SERIES-0402.jpg, Lead Spacing=-, Lead Style=-, Minimum Quantity=1, Mounting Type="Surface Mount, MLCC", Packaging="Cut Tape (CT)", Part Number=GRJ155R60J106ME11D, Part Status=Active, Quantity Available=64064, Series=GRJ, Size / Dimension="0.039\" L x 0.020\" W (1.00mm x 0.50mm)", Thickness (Max)="0.028\" (0.70mm)", Unit Price (USD)=0.23
C49: library part GCM155C71A105KE38D, "CAP CER 1UF 10V X7S 0402", Digi-Key Part Number=490-13409-1-ND, Manufacturer="Murata Electronics North America", Operating Temperature="-55°C ~ 125°C", Package / Case="0402 (1005 Metric)", Ratings=AEC-Q200, Temperature Coefficient=X7S, Tolerance=±10%, Voltage=10V, @ qty=0, Applications=Automotive, Datasheets=http://www.murata.com/~/media/webrenewal/support/library/catalog/products/capacitor/mlcc/c03e.ashx, Factory Stock=0, Features=-, Height - Seated (Max)=-, Image=//media.digikey.com/Renders/Murata%20Renders/ZRB-SERIES-0402.jpg, Lead Spacing=-, Lead Style=-, Minimum Quantity=1, Mounting Type="Surface Mount, MLCC", Packaging="Cut Tape (CT)", Part Number=GCM155C71A105KE38D, Part Status=Active, Quantity Available=7240, Series=GCM, Size / Dimension="0.039\" L x 0.020\" W (1.00mm x 0.50mm)", Thickness (Max)="0.022\" (0.55mm)", Unit Price (USD)=0.12
C51: library part GRM155R71E682KA01J, "CAP CER 6800PF 25V X7R 0402", Digi-Key Part Number=490-11422-1-ND, Manufacturer="Murata Electronics North America", Operating Temperature="-55°C ~ 125°C", Package / Case="0402 (1005 Metric)", Ratings=-, Temperature Coefficient=X7R, Tolerance=±10%, Voltage=25V, @ qty=0, Applications="General Purpose", Datasheets=http://www.murata.com/~/media/webrenewal/support/library/catalog/products/capacitor/mlcc/c02e.pdf, Factory Stock=0, Features=-, Height - Seated (Max)=-, Image=//media.digikey.com/Renders/Murata%20Renders/ZRB-SERIES-0402.jpg, Lead Spacing=-, Lead Style=-, Minimum Quantity=1, Mounting Type="Surface Mount, MLCC", Packaging="Cut Tape (CT)", Part Number=GRM155R71E682KA01J, Part Status=Active, Quantity Available=44380, Series=GRM, Size / Dimension="0.039\" L x 0.020\" W (1.00mm x 0.50mm)", Thickness (Max)="0.022\" (0.55mm)", Unit Price (USD)=0.1
CONN_1 CONN_2: library part 4_pin_1mm_header
D1 D2 D3: "Diode", Manufacturer_Name=Vishay, Mouser Part Number=782-VBPW34FASR, RS Part Number=7689401, Datasheet Link=https://www.vishay.com/docs/81127/vbpw34fa.pdf, Height=1.3mm, Manufacturer_Part_Number=VBPW34FASR, Mouser Price/Stock=https://www.mouser.com/Search/Refine.aspx?Keyword=782-VBPW34FASR, RS Price/Stock=https://uk.rs-online.com/web/p/products/7689401
DS1 DS2: library part CMP-1674-00008-1, "LED Uni-Color Orange, 75 mW, 30 mA, -35 to 85 degC, 2-Pin SMD, RoHS, Tape and Reel", Case\Package=0603, Case Code (Metric)=1608, Max Operating Temperature="155 degC", Min Operating Temperature="-55 degC", Package Quantity=5000, Power Rating="100 mW", Resistance="47 kohm", Tolerance=1%, Voltage Rating="50 V", Case Code (Imperial)=0603, ComponentLink1Description="Manufacturer URL", ComponentLink1URL=http://www.us.liteon.com/, ComponentLink2Description=Datasheet, ComponentLink2URL=http://optoelectronics.liteon.com/upload/download/DS-22-99-0186/S_110_LTST-C190KFKT.pdf, DatasheetVersion="Rev. I, 09/2011", Height="0.45 mm", Length="1.6 mm", Mount="Surface Mount", PackageDescription="2-Pin Surface Mount Device, Body 1.6 x 0.8 mm", PackageReference=C190KFKT, Packaging="Tape and Reel", Pins=2, REACH SVHC="No SVHC", RoHSCompliant=true, Voltage Rating (DC)="50 V", Width="0.8 mm"
FB1: "Ferrite Bead", Manufacturer_Name="Murata Electronics", Mouser Part Number=81-BLM18KG601SZ1D, Datasheet Link=http://www.murata.com/~/media/webrenewal/support/library/catalog/products/emc/emifil/c31e.ashx?la=en-gb, Height=0.95mm, Manufacturer_Part_Number=BLM18KG601SZ1D, Mouser Price/Stock=https://www.mouser.com/Search/Refine.aspx?Keyword=81-BLM18KG601SZ1D
IC3: "Integrated Circuit", Manufacturer_Name=STMicroelectronics, Mouser Part Number=511-USBLC6-2SC6, RS Part Number=9206266, Allied_Number=70389689, Allied Price/Stock=http://www.alliedelec.com/stmicroelectronics-usblc6-2sc6/70389689/, Datasheet Link=http://www.st.com/st-web-ui/static/active/en/resource/technical/document/datasheet/CD00050750.pdf, Height=1.45mm, Manufacturer_Part_Number=USBLC6-2SC6, Mouser Price/Stock=https://www.mouser.com/Search/Refine.aspx?Keyword=511-USBLC6-2SC6, RS Price/Stock=https://uk.rs-online.com/web/p/products/9206266
IC4: "Integrated Circuit", Manufacturer_Name=STMicroelectronics, Mouser Part Number=511-STM32WB55CGU6, Datasheet Link=https://www.st.com/en/microcontrollers/stm32wb55cg.html, Height=0.65mm, Manufacturer_Part_Number=STM32WB55CGU6, Mouser Price/Stock=https://www.mouser.com/Search/Refine.aspx?Keyword=511-STM32WB55CGU6
IC5 IC9: "Integrated Circuit", Manufacturer_Name="Fairchild Semiconductor", Mouser Part Number=512-FAN53600AUC33X, Datasheet Link=https://www.onsemi.com/pub/Collateral/FAN53610-D.pdf, Height=0.625mm, Manufacturer_Part_Number=FAN53600AUC33X, Mouser Price/Stock=https://www.mouser.com/Search/Refine.aspx?Keyword=512-FAN53600AUC33X
IC6 IC10: "Integrated Circuit", Manufacturer_Name=Microchip, Manufacturer_Part_Number=MCP73831T-2ACI/MC, Mouser Part Number=579-MCP73831T-2ACIMC, Allied_Number=70452042, Allied Price/Stock=https://www.alliedelec.com/microchiptechnologyinc-mcp73831t-2aci-mc/70452042/, Datasheet Link=http://ww1.microchip.com/downloads/en/DeviceDoc/20001984g.pdf, Height=1mm, Mouser Price/Stock=https://www.mouser.com/Search/Refine.aspx?Keyword=579-MCP73831T-2ACIMC
IC7: "Integrated Circuit", Manufacturer_Name="Texas Instruments", Mouser Part Number=595-TLV9062IDSGT, Datasheet Link=http://www.ti.com/lit/gpn/TLV9062, Height=0.8mm, Manufacturer_Part_Number=TLV9062IDSGT, Mouser Price/Stock=https://www.mouser.com/Search/Refine.aspx?Keyword=595-TLV9062IDSGT
IC8: "Integrated Circuit", Manufacturer_Name=STMicroelectronics, Mouser Part Number=511-STM32F301K6U6, Datasheet Link=http://www.mouser.com/ds/2/389/stm32f301c6-956213.pdf, Height=0.6mm, Manufacturer_Part_Number=STM32F301K6U6, Mouser Price/Stock=https://www.mouser.com/Search/Refine.aspx?Keyword=511-STM32F301K6U6
IC11: "Integrated Circuit", Manufacturer_Name="Texas Instruments", Manufacturer_Part_Number=LMP91051MT/NOPB, Mouser Part Number=595-LMP91051MT/NOPB, Datasheet Link=http://www.ti.com/lit/ds/symlink/lmp91051.pdf, Height=1.2mm, Mouser Price/Stock=https://www.mouser.com/Search/Refine.aspx?Keyword=595-LMP91051MT%2FNOPB
J4: "Connector", Manufacturer_Name=Hirose, Mouser Part Number=798-ZX62-B-5PA33, RS Part Number=1362267, Datasheet Link=http://www.mouser.com/ds/2/185/ZX_catalog-939768.pdf, Height=2.8mm, Manufacturer_Part_Number=ZX62-B-5PA(33), Mouser Price/Stock=https://www.mouser.com/Search/Refine.aspx?Keyword=798-ZX62-B-5PA33, RS Price/Stock=http://uk.rs-online.com/web/p/products/1362267
J5 J6: "Connector", Manufacturer_Name="Tag Connect", Datasheet Link=http://www.tag-connect.com/Materials/TC2030-CTX.pdf, Height=18mm, Manufacturer_Part_Number=TC2030-CTX-NL
J8: "Connector", Manufacturer_Name="TE Connectivity", Mouser Part Number=571-1-103542-2, Datasheet Link=http://www.te.com/commerce/DocumentDelivery/DDEController?Action=showdoc&DocId=Customer+Drawing%7F103542%7FJ3%7Fpdf%7FEnglish%7FENG_CD_103542_J3.pdf%7F1-103542-2, Height=10.744mm, Manufacturer_Part_Number=1-103542-2, Mouser Price/Stock=https://www.mouser.com/Search/Refine.aspx?Keyword=571-1-103542-2
L1 L2: "Inductor", Manufacturer_Name="Murata Electronics", Datasheet Link=https://www.arrow.com/en/products/lqg15hs2n7s02d/murata-manufacturing, Height=0.55mm, Manufacturer_Part_Number=LQG15HS2N7S02D
L3: "Inductor", Manufacturer_Name="TAIYO YUDEN", Mouser Part Number=963-LBR2012T100K, Datasheet Link=https://componentsearchengine.com/Datasheets/2/LBR2012T100K.pdf, Height=1.45mm, Manufacturer_Part_Number=LBR2012T100K, Mouser Price/Stock=https://www.mouser.com/Search/Refine.aspx?Keyword=963-LBR2012T100K
L4 L5: "Inductor", Manufacturer_Name="Murata Electronics", Mouser Part Number=81-LQM21PN1R0MC0D, RS Part Number=7926388, Datasheet Link=https://componentsearchengine.com/Datasheets/2/LQM21PN1R0MC0D.pdf, Height=0.55mm, Manufacturer_Part_Number=LQM21PN1R0MC0D, Mouser Price/Stock=https://www.mouser.com/Search/Refine.aspx?Keyword=81-LQM21PN1R0MC0D, RS Price/Stock=https://uk.rs-online.com/web/p/products/7926388
LED1: "LED", Manufacturer_Name=Kingbright, Mouser Part Number=604-APFA3010SEKJ3ZGK, Allied_Number=70820377, Allied Price/Stock=https://www.alliedelec.com/kingbright-apfa3010sekj3zgkqbkc/70820377/, Datasheet Link=http://www.kingbrightusa.com/images/catalog/SPEC/APFA3010SEKJ3ZGKQBKC.pdf, Manufacturer_Part_Number=APFA3010SEKJ3ZGKQBKC, Mouser Price/Stock=https://www.mouser.com/Search/Refine.aspx?Keyword=604-APFA3010SEKJ3ZGK
LED2: "LED", Manufacturer_Name="ROHM Semiconductor", Mouser Part Number=755-SMLP36RGB2W3R, RS Part Number=1246884, Datasheet Link=http://www.rohm.com/web/global/datasheet/SMLP36RGB2W(R), Manufacturer_Part_Number=SMLP36RGB2W3R, Mouser Price/Stock=https://www.mouser.com/Search/Refine.aspx?Keyword=755-SMLP36RGB2W3R, RS Price/Stock=https://uk.rs-online.com/web/p/products/1246884
P3 P4: "Header, 2-Pin", LatestRevisionDate=17-Jul-2002, LatestRevisionNote="Re-released for DXP Platform.", Publisher="Altium Limited"
PS1: "Power Supply", Manufacturer_Name="Texas Instruments", Mouser Part Number=595-TPS2115ADRBR, Datasheet Link=http://www.ti.com/lit/gpn/tps2115a, Height=1mm, Manufacturer_Part_Number=TPS2115ADRBR, Mouser Price/Stock=https://www.mouser.com/Search/Refine.aspx?Keyword=595-TPS2115ADRBR
R1 R12: library part ERJ-2GEJ104X, "RES SMD 100K OHM 5% 1/10W 0402", Digi-Key Part Number=P100KJCT-ND, Manufacturer="Panasonic Electronic Components", Operating Temperature="-55°C ~ 155°C", Package / Case="0402 (1005 Metric)", Power (Watts)="0.1W, 1/10W", Supplier Device Package=0402, Temperature Coefficient=±200ppm/°C, Tolerance=±5%, @ qty=1500, Composition="Thick Film", Datasheets=http://industrial.panasonic.com/www-cgi/jvcr13pz.cgi?E+PZ+3+AOA0001+ERJ2GEJ104X+7+WW, Factory Stock=0, Failure Rate=-, Features="Automotive AEC-Q200", Height - Seated (Max)="0.016\" (0.40mm)", Image=//media.digikey.com/Photos/Panasonic%20Photos/ERJ-PA2-Series.jpg, Minimum Quantity=1, Number of Terminations=2, Packaging="Cut Tape (CT)", Part Number=ERJ-2GEJ104X, Part Status=Active, Quantity Available=2387986, Series=ERJ, Size / Dimension="0.039\" L x 0.020\" W (1.00mm x 0.50mm)", Unit Price (USD)=0.00350
R2 R3: library part Resistor
R4 R5 R23: library part ERJ-2GEJ102X, "RES SMD 1K OHM 5% 1/10W 0402", Digi-Key Part Number=P1.0KJCT-ND, Manufacturer="Panasonic Electronic Components", Operating Temperature="-55°C ~ 155°C", Package / Case="0402 (1005 Metric)", Power (Watts)="0.1W, 1/10W", Supplier Device Package=0402, Temperature Coefficient=±200ppm/°C, Tolerance=±5%, @ qty=1500, Composition="Thick Film", Datasheets=http://industrial.panasonic.com/www-cgi/jvcr13pz.cgi?E+PZ+3+AOA0001+ERJ2GEJ102X+7+WW, Factory Stock=0, Failure Rate=-, Features="Automotive AEC-Q200", Height - Seated (Max)="0.016\" (0.40mm)", Image=//media.digikey.com/Photos/Panasonic%20Photos/ERJ-PA2-Series.jpg, Minimum Quantity=1, Number of Terminations=2, Packaging="Cut Tape (CT)", Part Number=ERJ-2GEJ102X, Part Status=Active, Quantity Available=1939857, Series=ERJ, Size / Dimension="0.039\" L x 0.020\" W (1.00mm x 0.50mm)", Unit Price (USD)=0.00350
R6 R7 R15 R16 R17 R26: library part ERJ-2GEJ103X, "RES SMD 10K OHM 5% 1/10W 0402", Digi-Key Part Number=P10KJCT-ND, Manufacturer="Panasonic Electronic Components", Operating Temperature="-55°C ~ 155°C", Package / Case="0402 (1005 Metric)", Power (Watts)="0.1W, 1/10W", Supplier Device Package=0402, Temperature Coefficient=±200ppm/°C, Tolerance=±5%, @ qty=1500, Composition="Thick Film", Datasheets=http://industrial.panasonic.com/www-cgi/jvcr13pz.cgi?E+PZ+3+AOA0001+ERJ2GEJ103X+7+WW, Factory Stock=0, Failure Rate=-, Features="Automotive AEC-Q200", Height - Seated (Max)="0.016\" (0.40mm)", Image=//media.digikey.com/Photos/Panasonic%20Photos/ERJ-PA2-Series.jpg, Minimum Quantity=1, Number of Terminations=2, Packaging="Cut Tape (CT)", Part Number=ERJ-2GEJ103X, Part Status=Active, Quantity Available=2560215, Series=ERJ, Size / Dimension="0.039\" L x 0.020\" W (1.00mm x 0.50mm)", Unit Price (USD)=0.00350
R8: library part ERJ-2RKF1003X, "RES SMD 100K OHM 1% 1/10W 0402", Digi-Key Part Number=P100KLCT-ND, Manufacturer="Panasonic Electronic Components", Operating Temperature="-55°C ~ 155°C", Package / Case="0402 (1005 Metric)", Power (Watts)="0.1W, 1/10W", Supplier Device Package=0402, Temperature Coefficient=±100ppm/°C, Tolerance=±1%, @ qty=1500, Composition="Thick Film", Datasheets=http://industrial.panasonic.com/www-cgi/jvcr13pz.cgi?E+PZ+3+AOA0002+ERJ2RKF1003X+7+WW, Factory Stock=0, Failure Rate=-, Features="Automotive AEC-Q200", Height - Seated (Max)="0.016\" (0.40mm)", Image=//media.digikey.com/Photos/Panasonic%20Photos/ERJ-PA2-Series.jpg, Minimum Quantity=1, Number of Terminations=2, Packaging="Cut Tape (CT)", Part Number=ERJ-2RKF1003X, Part Status=Active, Quantity Available=2645965, Series=ERJ, Size / Dimension="0.039\" L x 0.020\" W (1.00mm x 0.50mm)", Unit Price (USD)=0.00496
R9 R21: library part ERJ-2RKF8062X, "RES SMD 80.6K OHM 1% 1/10W 0402", Digi-Key Part Number=P80.6KLCT-ND, Manufacturer="Panasonic Electronic Components", Operating Temperature="-55°C ~ 155°C", Package / Case="0402 (1005 Metric)", Power (Watts)="0.1W, 1/10W", Supplier Device Package=0402, Temperature Coefficient=±100ppm/°C, Tolerance=±1%, @ qty=1500, Composition="Thick Film", Datasheets=http://industrial.panasonic.com/www-cgi/jvcr13pz.cgi?E+PZ+3+AOA0002+ERJ2RKF8062X+7+WW, Factory Stock=0, Failure Rate=-, Features="Automotive AEC-Q200", Height - Seated (Max)="0.016\" (0.40mm)", Image=//media.digikey.com/Photos/Panasonic%20Photos/ERJ-PA2-Series.jpg, Minimum Quantity=1, Number of Terminations=2, Packaging="Cut Tape (CT)", Part Number=ERJ-2RKF8062X, Part Status=Active, Quantity Available=91747, Series=ERJ, Size / Dimension="0.039\" L x 0.020\" W (1.00mm x 0.50mm)", Unit Price (USD)=0.00496
R10 R22: library part ERJ-2GEJ562X, "RES SMD 5.6K OHM 5% 1/10W 0402", Digi-Key Part Number=P5.6KJCT-ND, Manufacturer="Panasonic Electronic Components", Operating Temperature="-55°C ~ 155°C", Package / Case="0402 (1005 Metric)", Power (Watts)="0.1W, 1/10W", Supplier Device Package=0402, Temperature Coefficient=±200ppm/°C, Tolerance=±5%, @ qty=1500, Composition="Thick Film", Datasheets=http://industrial.panasonic.com/www-cgi/jvcr13pz.cgi?E+PZ+3+AOA0001+ERJ2GEJ562X+7+WW, Factory Stock=0, Failure Rate=-, Features="Automotive AEC-Q200", Height - Seated (Max)="0.016\" (0.40mm)", Image=//media.digikey.com/Photos/Panasonic%20Photos/ERJ-PA2-Series.jpg, Minimum Quantity=1, Number of Terminations=2, Packaging="Cut Tape (CT)", Part Number=ERJ-2GEJ562X, Part Status=Active, Quantity Available=212112, Series=ERJ, Size / Dimension="0.039\" L x 0.020\" W (1.00mm x 0.50mm)", Unit Price (USD)=0.00350
R11 R13: library part ERJ-2GEJ473X, "RES SMD 47K OHM 5% 1/10W 0402", Digi-Key Part Number=P47KJCT-ND, Manufacturer="Panasonic Electronic Components", Operating Temperature="-55°C ~ 155°C", Package / Case="0402 (1005 Metric)", Power (Watts)="0.1W, 1/10W", Supplier Device Package=0402, Temperature Coefficient=±200ppm/°C, Tolerance=±5%, @ qty=1500, Composition="Thick Film", Datasheets=http://industrial.panasonic.com/www-cgi/jvcr13pz.cgi?E+PZ+3+AOA0001+ERJ2GEJ473X+7+WW, Factory Stock=0, Failure Rate=-, Features="Automotive AEC-Q200", Height - Seated (Max)="0.016\" (0.40mm)", Image=//media.digikey.com/Photos/Panasonic%20Photos/ERJ-PA2-Series.jpg, Minimum Quantity=1, Number of Terminations=2, Packaging="Cut Tape (CT)", Part Number=ERJ-2GEJ473X, Part Status=Active, Quantity Available=5182645, Series=ERJ, Size / Dimension="0.039\" L x 0.020\" W (1.00mm x 0.50mm)", Unit Price (USD)=0.00350
R14: library part ERJ-2GEJ332X, "RES SMD 3.3K OHM 5% 1/10W 0402", Digi-Key Part Number=P3.3KJCT-ND, Manufacturer="Panasonic Electronic Components", Operating Temperature="-55°C ~ 155°C", Package / Case="0402 (1005 Metric)", Power (Watts)="0.1W, 1/10W", Supplier Device Package=0402, Temperature Coefficient=±200ppm/°C, Tolerance=±5%, @ qty=1500, Composition="Thick Film", Datasheets=http://industrial.panasonic.com/www-cgi/jvcr13pz.cgi?E+PZ+3+AOA0001+ERJ2GEJ332X+7+WW, Factory Stock=0, Failure Rate=-, Features="Automotive AEC-Q200", Height - Seated (Max)="0.016\" (0.40mm)", Image=//media.digikey.com/Photos/Panasonic%20Photos/ERJ-PA2-Series.jpg, Minimum Quantity=1, Number of Terminations=2, Packaging="Cut Tape (CT)", Part Number=ERJ-2GEJ332X, Part Status=Active, Quantity Available=514266, Series=ERJ, Size / Dimension="0.039\" L x 0.020\" W (1.00mm x 0.50mm)", Unit Price (USD)=0.00350